# Altium PCB MainBoard.PcbDoc
Units mil, origin at the board's own origin, x right, y up, seen from the top; angles counter-clockwise.
Board outline 5000 x 4000 mil, 4 copper layers (Top Layer, Signal Layer 1, Signal Layer 2, Bottom Layer), stack 30.634 mil thick; 88 components, 118 nets, 480 pads, 59 vias.
Unrouted connection lines stored in the file: 60.
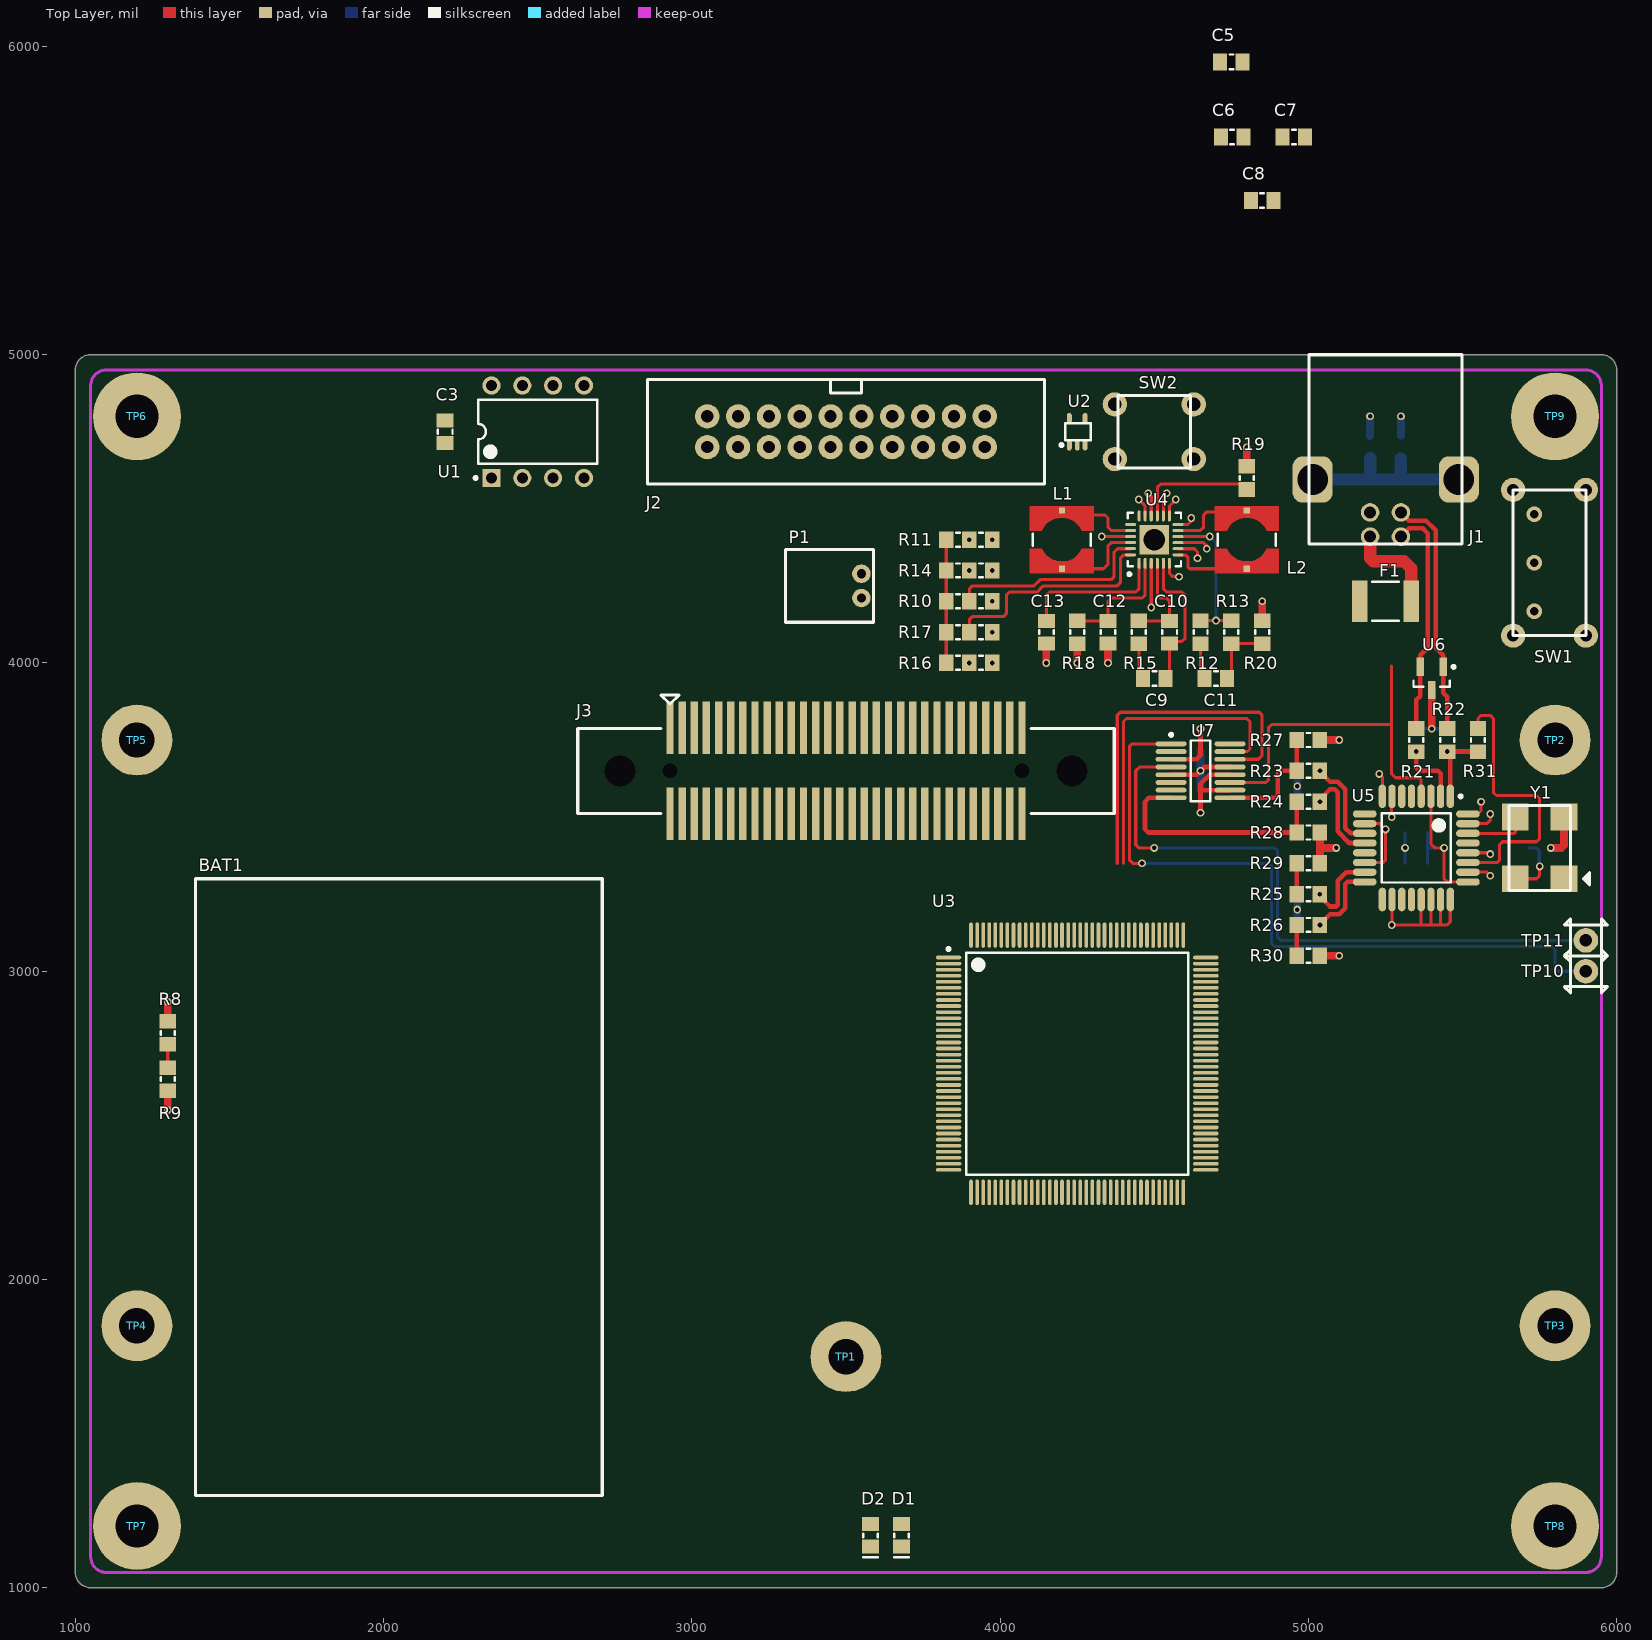
[diagram p0: Top Layer view]
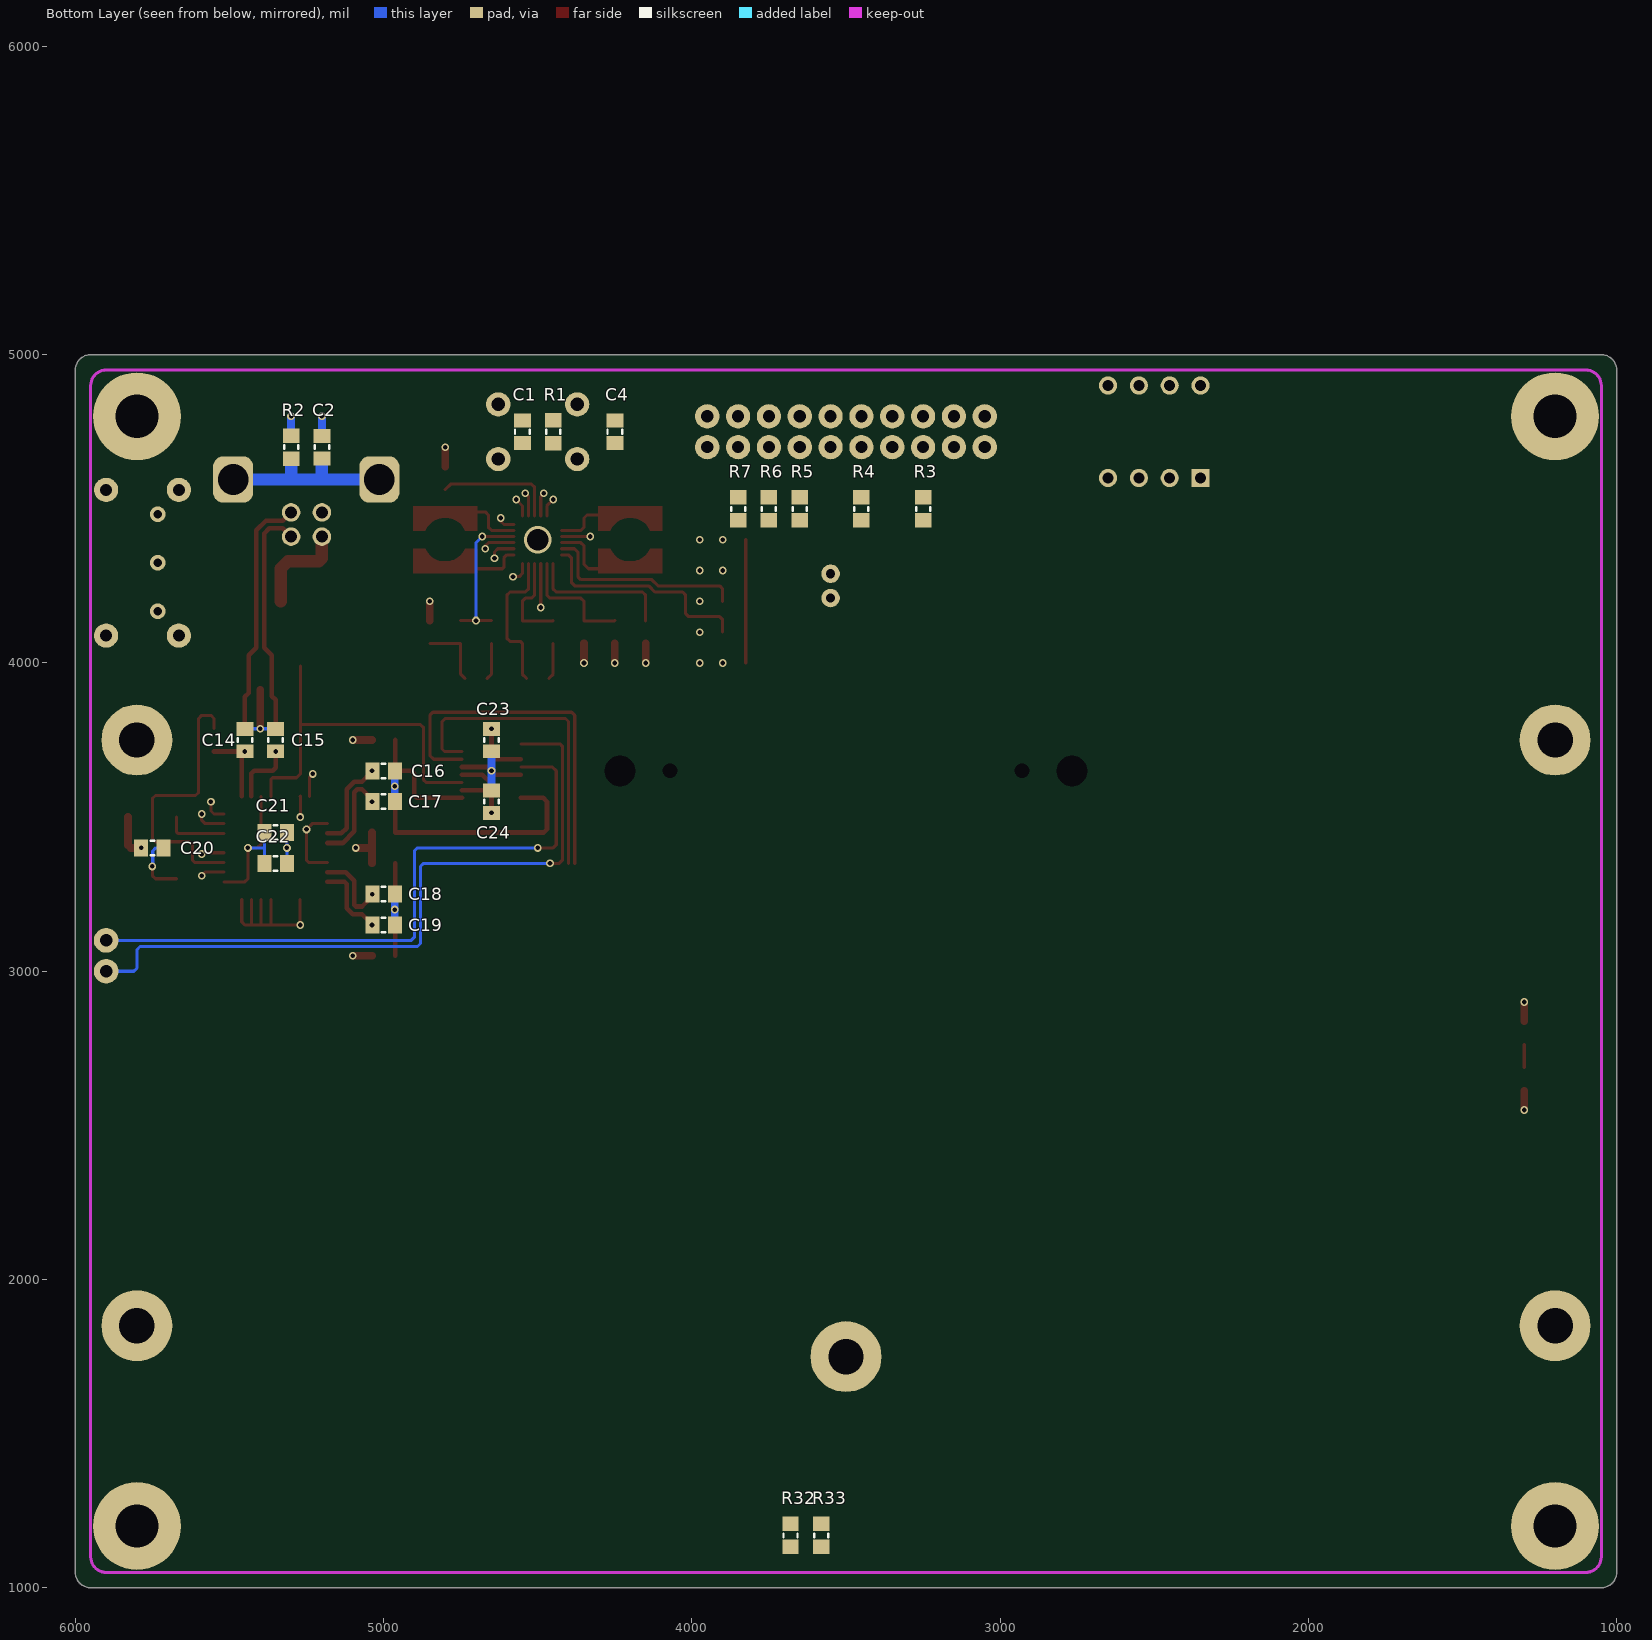
[diagram p1: Bottom Layer view, seen from below]
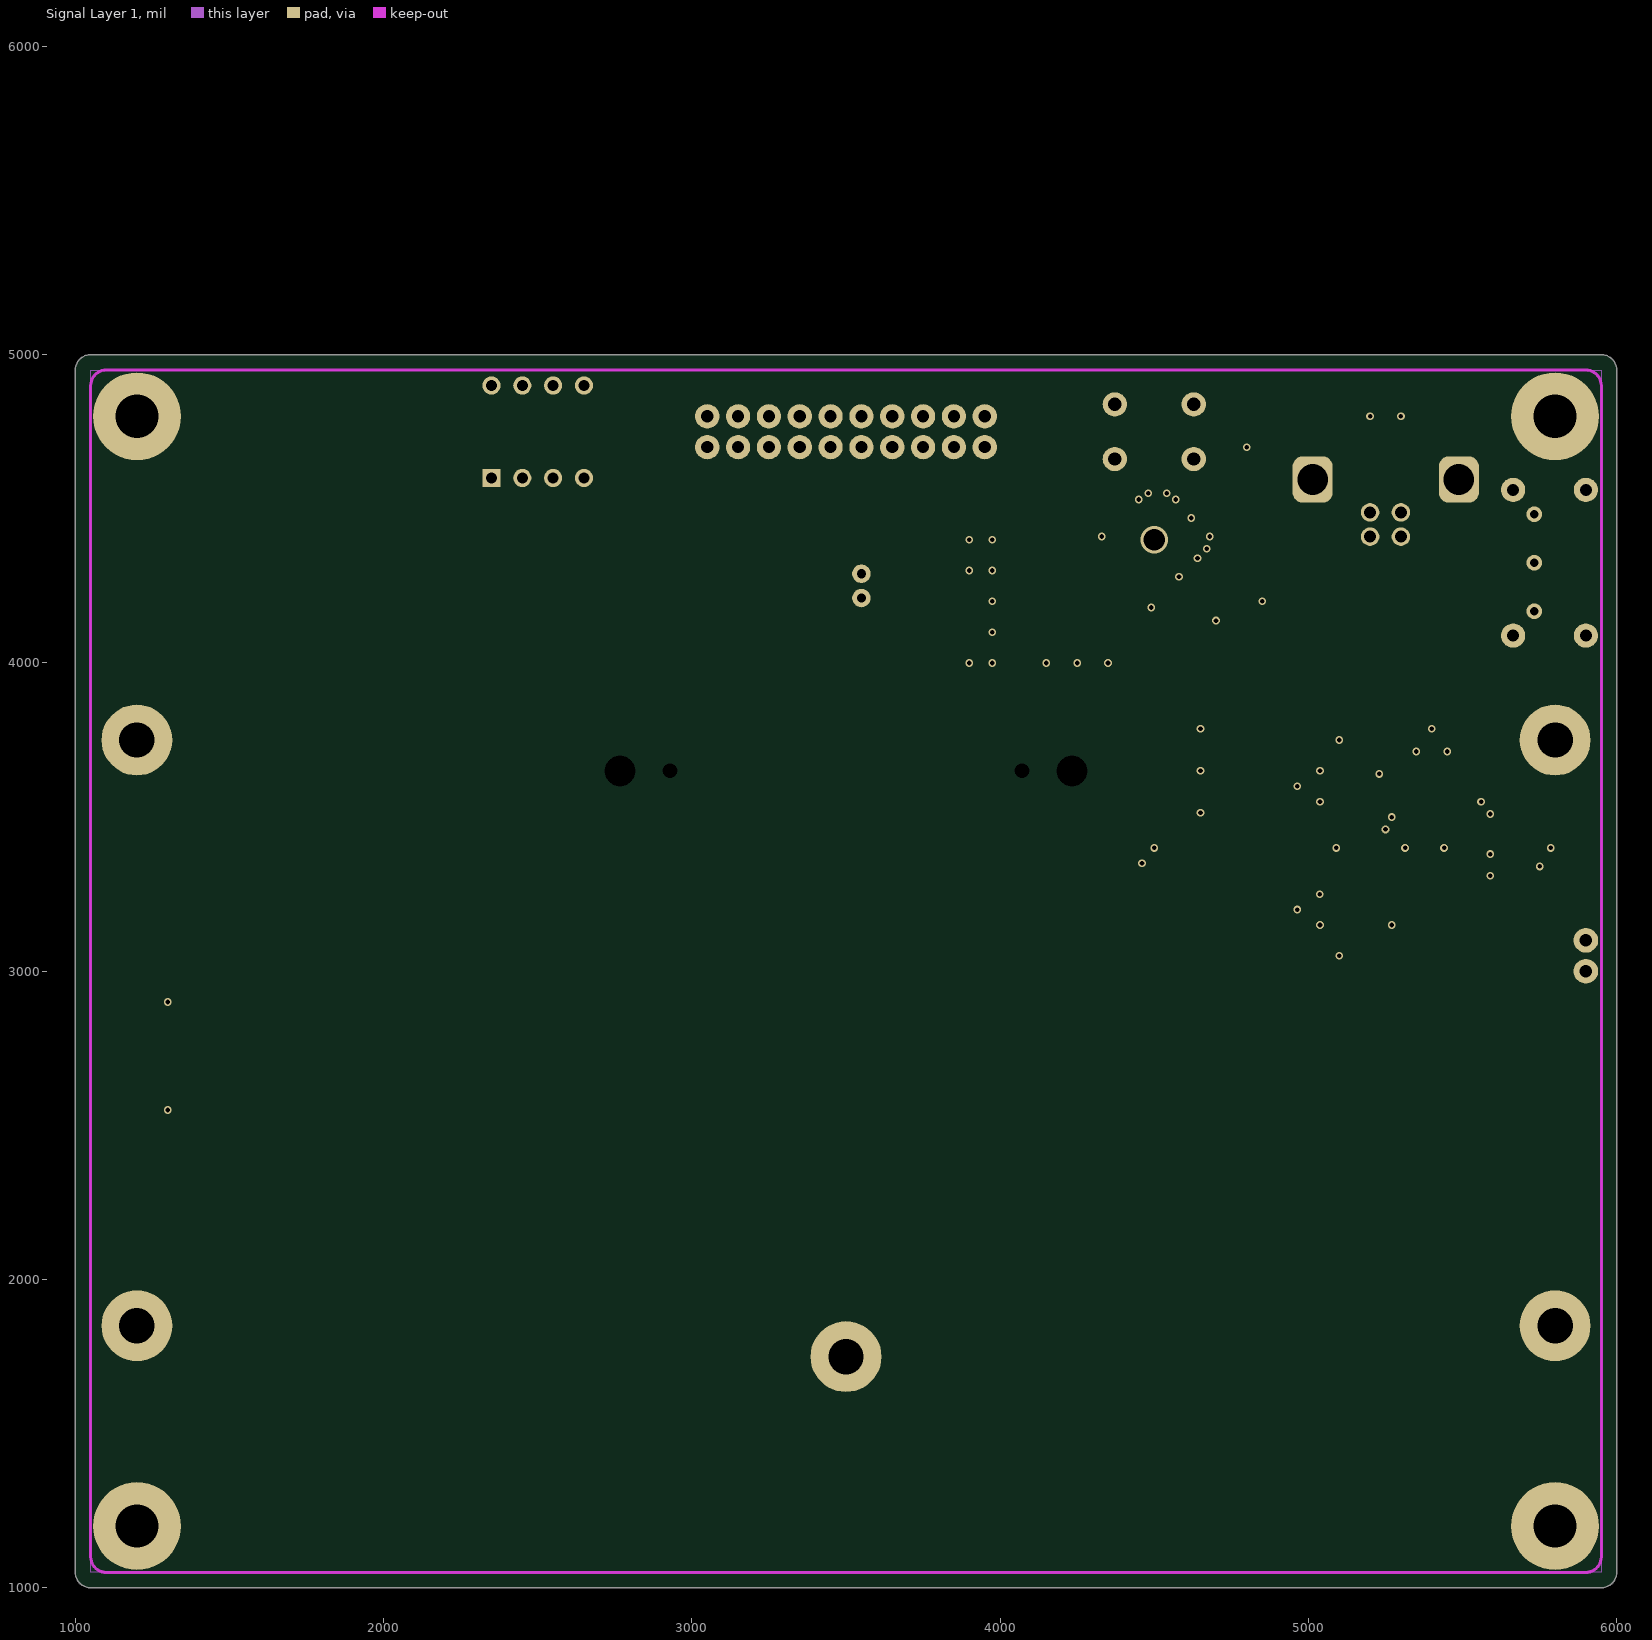
[diagram p2: Signal Layer 1]
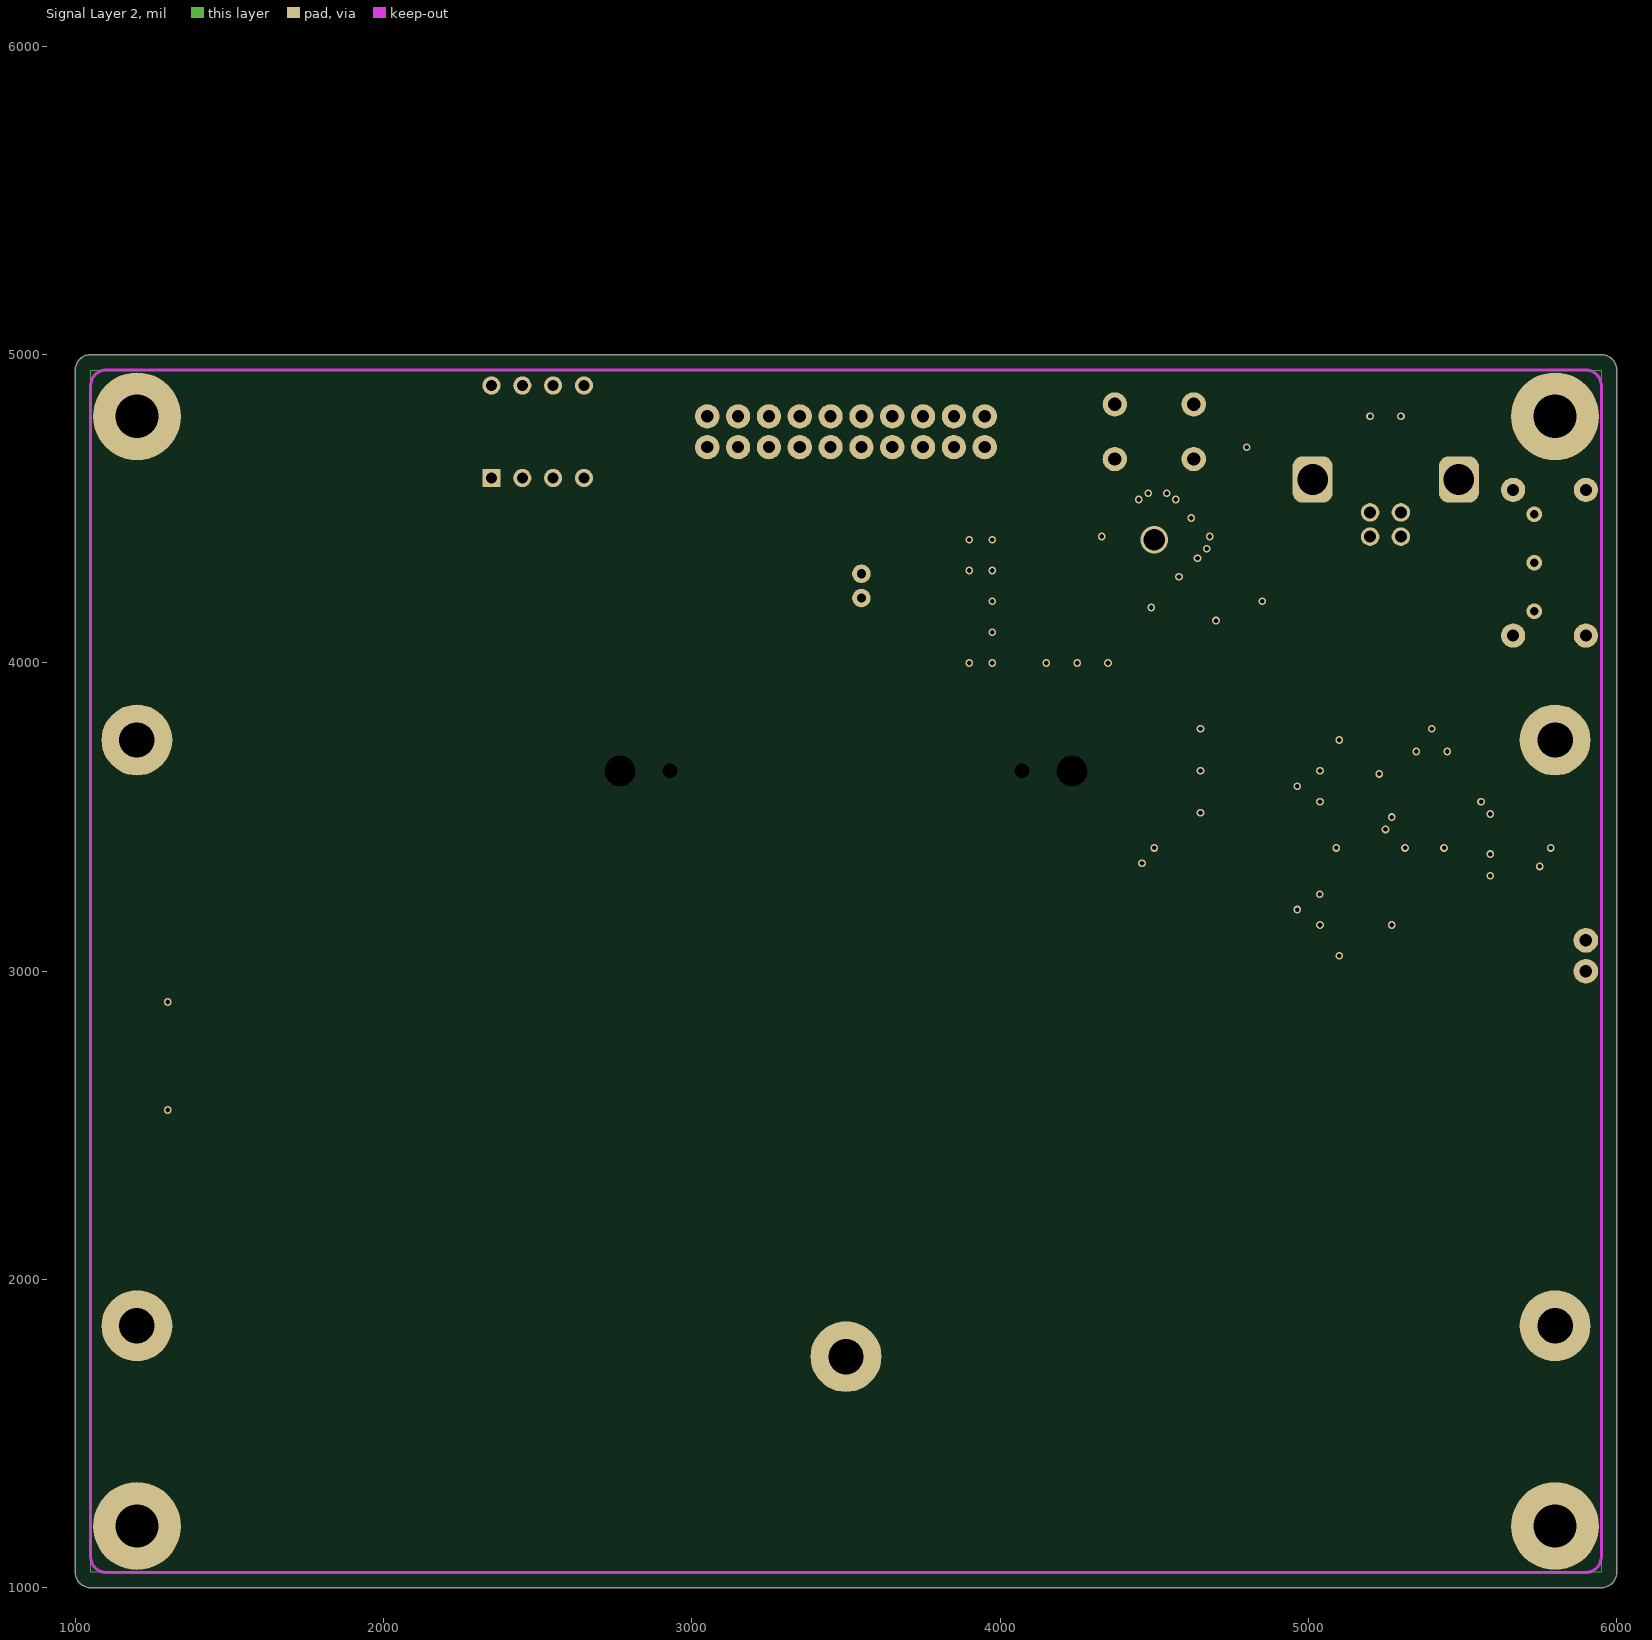
[diagram p3: Signal Layer 2]

## Layer stack, top to bottom
Top Solder: solder mask 0.4, Solder Resist, Dk 3.5
Top Layer: signal copper 1.4
Dielectric 1: core 10, FR-4, Dk 4.2
Signal Layer 1: signal copper 1.417
Dielectric 3: prepreg 5, Dk 4.2
Signal Layer 2: signal copper 1.417
Dielectric 2: core 10, Dk 4.2
Bottom Layer: signal copper 1.4
Bottom Solder: solder mask 0.4, Solder Resist, Dk 3.5

## Board outline
1050,1000 cw(c1050,1050) 1000,1050 1000,4950 cw(c1050,4950) 1050,5000 5950,5000 cw(c5950,4950) 6000,4950 6000,1050 cw(c5950,1050) 5950,1000

## Design rules (kind name [scope] priority, off if disabled: settings)
Clearance [All] p1: gap=10
DiffPairsRouting [All] p1: maxlimit=10 minlimit=10 mostfreqgap=10 toplayer_minwidth=15 toplayer_maxwidth=15 toplayer_prefwidth=15 midlayer1_minwidth=15 midlayer1_maxwidth=15 midlayer1_prefwidth=15 midlayer2_minwidth=15 midlayer2_maxwidth=15 midlayer2_prefwidth=15 bottomlayer_minwidth=15 bottomlayer_maxwidth=15 bottomlayer_prefwidth=15 maxuncoupledlength=500
PolygonConnect [All] p1: connectstyle=Relief reliefconductorwidth=10 reliefentries=4 polygonreliefangle="90 Angle" airgapwidth=10
RoutingVias [All] p1: holewidth=15 width=25 viastyle="Through Hole" minholewidth=15 minwidth=25 maxholewidth=28 maxwidth=50
SolderMaskExpansion [All] p1: expansion=4
Width [All] p1: maxlimit=100 minlimit=10 preferedwidth=10 minimp=50.000000 maximp=50.000000 favimp=50.000000
29 further rules are at their usual default settings.

## Classes and differential pairs
differential pair USB: +USB_P -USB_N
differential pair HUB: +HUB_P -HUB_N
differential pair HUB_FTDI: +HUB_FTDI_P -HUB_FTDI_N
differential pair HUB_ARM: +HUB_ARM_P -HUB_ARM_N
differential pair FTDI: +FTDI_P -FTDI_N
differential pair ARM: +ARM_P -ARM_N

## Components (designator, comment, footprint, x,y, rotation, side; value= is the part's Value field where it differs from the comment)
BAT1 "PRT-00339" "LiPo Battery - 1000mA" 2050,2300 r180 top (schematic designator BAT?)
C1 "1µF" C0805(2012)_NP_med 4550,4750 r90 bottom
C2 "4.7nF" C0805(2012)_NP_med 5200,4700 r90 bottom
C3 "0.1µF" C0805(2012)_NP_med 2200,4750 r270 top
C4 "0.1µF" C0805(2012)_NP_med 4250,4750 r270 bottom
C5 "10µF" C0805(2012)_NP_med 4750,5950 r0 top
C6 "22µF" C0805(2012)_NP_med 4752.76,5705.91 r0 top
C7 "2.2µF" C0805(2012)_NP_med 4952.76,5705.91 r0 top
C8 "22µF" C0805(2012)_NP_med 4850,5500 r0 top
C9 "330pF" C0805(2012)_NP_med 4500,3950 r180 top
C10 "10pF" C0805(2012)_NP_med 4550,4100 r90 top
C11 "33pF" C0805(2012)_NP_med 4700,3950 r180 top
C12 "0.1µF" C0805(2012)_NP_med 4350,4100 r270 top
C13 "0.1µF" C0805(2012)_NP_med 4150,4100 r270 top
C14 "47pF" C0805(2012)_NP_med 5450,3750 r90 bottom
C15 "47pF" C0805(2012)_NP_med 5350,3750 r90 bottom
C16 "47pF" C0805(2012)_NP_med 5000,3650 r180 bottom
C17 "47pF" C0805(2012)_NP_med 5000,3550 r180 bottom
C18 "47pF" C0805(2012)_NP_med 5000,3250 r180 bottom
C19 "47pF" C0805(2012)_NP_med 5000,3150 r180 bottom
C20 "0.1µF" C0805(2012)_NP_med 5750,3400 r0 bottom
C21 "0.1µF" C0805(2012)_NP_med 5350,3450 r180 bottom
C22 "0.1µF" C0805(2012)_NP_med 5350,3350 r180 bottom
C23 "4.7µF" C0805(2012)_NP_med 4650,3750 r270 bottom
C24 "0.1µF" C0805(2012)_NP_med 4650,3550 r90 bottom
D1 "LG R971-KN-1" C0805(2012)_P_med 3680,1170 r90 top
D2 "LG R971-KN-1" C0805(2012)_P_med 3580,1170 r90 top
F1 "Bel 0ZCG0200FF2C" C1812(4532)_NP_med 5250,4200 r180 top
J1 "KUSBXHT-BS1N-O-HRF" "Kycon KUSBXHT-BS1N-O-HRF" 5250,4595 r180 top locked
J2 "ARM JTAG" "3M 2520-6002UB" 3500,4750 r180 top
J3 "FSI-130-10-L-D-E-AD Mate" "FSI-130-10-L-D-E-AD - Mate" 3500,3650 r180 top locked
L1 "Wurth 744043003" "WURTH WE-TPC 4828" 4200,4400 r180 top
L2 "Wurth 7440430022" "WURTH WE-TPC 4828" 4800,4400 r0 top
P1 "PRT-09749" "SPARKFUN PRT-09749" 3550,4250 r270 top
R1 "10kΩ" R0805(2012)_med 4450,4750 r270 bottom
R2 "1MΩ" R0805(2012)_med 5300,4700 r90 bottom
R3 "10kΩ" R0805(2012)_med 3250,4500 r90 bottom
R4 "10kΩ" R0805(2012)_med 3450,4500 r90 bottom
R5 "10kΩ" R0805(2012)_med 3650,4500 r90 bottom
R6 "10kΩ" R0805(2012)_med 3750,4500 r90 bottom
R7 "10kΩ" R0805(2012)_med 3850,4500 r90 bottom
R8 "100kΩ" R0805(2012)_med 1300,2800 r90 top
R9 "Vishay NTCS0805E3104FXT" R0805(2012)_med 1300,2650 r90 top
R10 "0" R0805(2012)_med_double 3900,4200 r0 top
R11 "0" R0805(2012)_med_double 3900,4400 r0 top
R12 "121kΩ" R0805(2012)_med 4650,4100 r270 top
R13 "324kΩ" R0805(2012)_med 4750,4100 r270 top
R14 "0" R0805(2012)_med_double 3900,4300 r0 top
R15 "15kΩ" R0805(2012)_med 4450,4100 r90 top
R16 "0" R0805(2012)_med_double 3900,4000 r0 top
R17 "0" R0805(2012)_med_double 3900,4100 r0 top
R18 "3.01kΩ" R0805(2012)_med 4250,4100 r270 top
R19 "2kΩ" R0805(2012)_med 4800,4600 r90 top
R20 "105kΩ" R0805(2012)_med 4850,4100 r90 top
R21 "27Ω" R0805(2012)_med 5350,3750 r270 top
R22 "27Ω" R0805(2012)_med 5450,3750 r270 top
R23 "27Ω" R0805(2012)_med 5000,3650 r0 top
R24 "27Ω" R0805(2012)_med 5000,3550 r0 top
R25 "27Ω" R0805(2012)_med 5000,3250 r0 top
R26 "27Ω" R0805(2012)_med 5000,3150 r0 top
R27 "15kΩ" R0805(2012)_med 5000,3750 r180 top
R28 "15kΩ" R0805(2012)_med 5000,3450 r180 top
R29 "15kΩ" R0805(2012)_med 5000,3350 r180 top
R30 "15kΩ" R0805(2012)_med 5000,3050 r180 top
R31 "1.5kΩ" R0805(2012)_med 5550,3750 r270 top
R32 "220Ω" R0805(2012)_med 3680,1170 r90 bottom
R33 "220Ω" R0805(2012)_med 3580,1170 r90 bottom
SW1 "E-Switch EG1224" "E-Switch EG1224" 5782,4325 r90 top locked
SW2 "1825910-7" "TE 1825910-6" 4500,4750 r0 top locked
TP1 "Testpoint" "4-40 HOLE" 3500,1750 r0 top locked
TP2 "Testpoint" "4-40 HOLE" 5800,3750 r0 top locked
TP3 "Testpoint" "4-40 HOLE" 5800,1850 r0 top locked
TP4 "Testpoint" "4-40 HOLE" 1200,1850 r0 top locked
TP5 "Testpoint" "4-40 HOLE" 1200,3750 r0 top locked
TP6 "Testpoint" "6-32 Hole" 1200,4800 r0 top
TP7 "Testpoint" "6-32 Hole" 1200,1200 r0 top
TP8 "Testpoint" "6-32 Hole" 5800,1200 r0 top
TP9 "Testpoint" "6-32 Hole" 5800,4800 r0 top
TP10 "Testpoint" TESTPOINT 5900,3000 r180 top
TP11 "Testpoint" TESTPOINT 5900,3100 r180 top
U1 "25AA1024-I/P" PDIP300-P8 2500,4750 r90 top locked
U2 "TI SN74AUP1T08DCKR" "TI 5 Pin DCK (R-PDSO-G5)" 4250,4750 r90 top
U3 "ATSAME70Q21" "Atmel 144AA_M" 4250,2700 r0 top
U4 "LTC3566EUF#PBF" LT-UF-24_N 4500,4400 r90 top
U5 "TUSB2036VF" VF32_M 5350,3400 r270 top
U6 "TPD2E009DBZR" DBZ3_N 5400,3950 r270 top
U7 "FT230XS-R" SSOP-16_M 4650,3650 r0 top
Y1 "ASV-48.000MHZ-EJ-T" "Abracon ASV XO" 5750,3400 r90 top locked

## Footprints (in the part's own frame and the unit in brackets; to place one, negate y for a bottom-side part, rotate by r counter-clockwise, add the part's x,y. Pads: shape width x height; smd on the part's side, far side on the other; paste and mask are expansions set on the pad)
"3M 2520-6002UB" [mm] "SHROUDED HEADER 20 POS STRAIGHT"
  round 2 hole 1: 1(-11.43,-1.27) 2(-11.43,1.27) 3(-8.89,-1.27) 4(-8.89,1.27) 5(-6.35,-1.27) 6(-6.35,1.27) 7(-3.81,-1.27) 8(-3.81,1.27) 9(-1.27,-1.27) 10(-1.27,1.27) 11(1.27,-1.27) 12(1.27,1.27) 13(3.81,-1.27) 14(3.81,1.27) 15(6.35,-1.27) 16(6.35,1.27) 17(8.89,-1.27) 18(8.89,1.27) 19(11.43,-1.27) 20(11.43,1.27)
  silkscreen extent -16.36,-4.3 16.36,4.3, body extent -16.36,-4.3 16.36,4.29, height 9.91
"4-40 HOLE" [mil] "A hole"
  round 230 hole 115: 1(0,0)
"6-32 Hole" [mil] "A hole"
  round 285 hole 140: 1(0,0)
"Abracon ASV XO" [mm] "OSCILLATOR 16.000MHZ 3.3V SMD"
  rect 2.2x2.2 smd: 1(-2.54,-2) 2(2.54,-2) 3(2.54,2) 4(-2.54,2)
  silkscreen extent -3.5,-4.11 3.5,2.54, body extent -3.5,-2.54 3.5,2.54, height 1.8
"Atmel 144AA_M" [mm] "Thin QFP, 144-Leads, Body 20x20mm, Pitch 0.5mm, IPC Low Density"
  oval 2.1x0.3 smd: 1(-10.6,8.75) 2(-10.6,8.25) 3(-10.6,7.75) 4(-10.6,7.25) 5(-10.6,6.75) 6(-10.6,6.25) 7(-10.6,5.75) 8(-10.6,5.25) 9(-10.6,4.75) 10(-10.6,4.25) 11(-10.6,3.75) 12(-10.6,3.25) 13(-10.6,2.75) 14(-10.6,2.25) 15(-10.6,1.75) 16(-10.6,1.25) 17(-10.6,0.75) 18(-10.6,0.25) 19(-10.6,-0.25) 20(-10.6,-0.75) 21(-10.6,-1.25) 22(-10.6,-1.75) 23(-10.6,-2.25) 24(-10.6,-2.75) 25(-10.6,-3.25) 26(-10.6,-3.75) 27(-10.6,-4.25) 28(-10.6,-4.75) 29(-10.6,-5.25) 30(-10.6,-5.75) 31(-10.6,-6.25) 32(-10.6,-6.75) 33(-10.6,-7.25) 34(-10.6,-7.75) 35(-10.6,-8.25) 36(-10.6,-8.75) 73(10.6,-8.75) 74(10.6,-8.25) 75(10.6,-7.75) 76(10.6,-7.25) 77(10.6,-6.75) 78(10.6,-6.25) 79(10.6,-5.75) 80(10.6,-5.25) 81(10.6,-4.75) 82(10.6,-4.25) 83(10.6,-3.75) 84(10.6,-3.25) 85(10.6,-2.75) 86(10.6,-2.25) 87(10.6,-1.75) 88(10.6,-1.25) 89(10.6,-0.75) 90(10.6,-0.25) 91(10.6,0.25) 92(10.6,0.75) 93(10.6,1.25) 94(10.6,1.75) 95(10.6,2.25) 96(10.6,2.75) 97(10.6,3.25) 98(10.6,3.75) 99(10.6,4.25) 100(10.6,4.75) 101(10.6,5.25) 102(10.6,5.75) 103(10.6,6.25) 104(10.6,6.75) 105(10.6,7.25) 106(10.6,7.75) 107(10.6,8.25) 108(10.6,8.75)
  oval 0.3x2.1 smd: 37(-8.75,-10.6) 38(-8.25,-10.6) 39(-7.75,-10.6) 40(-7.25,-10.6) 41(-6.75,-10.6) 42(-6.25,-10.6) 43(-5.75,-10.6) 44(-5.25,-10.6) 45(-4.75,-10.6) 46(-4.25,-10.6) 47(-3.75,-10.6) 48(-3.25,-10.6) 49(-2.75,-10.6) 50(-2.25,-10.6) 51(-1.75,-10.6) 52(-1.25,-10.6) 53(-0.75,-10.6) 54(-0.25,-10.6) 55(0.25,-10.6) 56(0.75,-10.6) 57(1.25,-10.6) 58(1.75,-10.6) 59(2.25,-10.6) 60(2.75,-10.6) 61(3.25,-10.6) 62(3.75,-10.6) 63(4.25,-10.6) 64(4.75,-10.6) 65(5.25,-10.6) 66(5.75,-10.6) 67(6.25,-10.6) 68(6.75,-10.6) 69(7.25,-10.6) 70(7.75,-10.6) 71(8.25,-10.6) 72(8.75,-10.6) 109(8.75,10.6) 110(8.25,10.6) 111(7.75,10.6) 112(7.25,10.6) 113(6.75,10.6) 114(6.25,10.6) 115(5.75,10.6) 116(5.25,10.6) 117(4.75,10.6) 118(4.25,10.6) 119(3.75,10.6) 120(3.25,10.6) 121(2.75,10.6) 122(2.25,10.6) 123(1.75,10.6) 124(1.25,10.6) 125(0.75,10.6) 126(0.25,10.6) 127(-0.25,10.6) 128(-0.75,10.6) 129(-1.25,10.6) 130(-1.75,10.6) 131(-2.25,10.6) 132(-2.75,10.6) 133(-3.25,10.6) 134(-3.75,10.6) 135(-4.25,10.6) 136(-4.75,10.6) 137(-5.25,10.6) 138(-5.75,10.6) 139(-6.25,10.6) 140(-6.75,10.6) 141(-7.25,10.6) 142(-7.75,10.6) 143(-8.25,10.6) 144(-8.75,10.6)
  silkscreen extent -10.72,-9.15 9.15,9.57, body extent -10,-10 10,10, height 1.6
C0805(2012)_NP_med [mm] "Chip Capacitor, 2-Leads, Body 2.0x1.3mm, IPC Medium Density"
  rect 1.15x1.4 smd: 1(-0.925,0) 2(0.925,0)
  silkscreen extent -0.15,-0.6 0.15,0.6, body extent -1.1,-0.67 1.1,0.67, height 0.7
C0805(2012)_P_med [mm] "Chip Capacitor, 2-Leads, Body 2.0x1.3mm, IPC Medium Density"
  rect 1.15x1.4 smd: 1(-0.925,0) 2(0.925,0)
  silkscreen extent -1.8,-0.6 0.15,0.6, body extent -1.1,-0.67 1.1,0.67, height 0.7
C1812(4532)_NP_med [mm] "Chip Capacitor, 2-Leads, Body 4.5x3.2mm, IPC Medium Density"
  rect 1.25x3.4 smd: 1(-2.125,0) 2(2.125,0)
  silkscreen extent -1.1,-1.6 1.1,1.6, body extent -2.35,-1.7 2.35,1.7, height 0.7
DBZ3_N [mm] "SOT23, 3-Leads, Body 2.9x1.3mm, Pitch 0.95mm, Lead Span 2.4mm, IPC Medium Density"
  rect 1.5x0.6 smd: 1(-0.95,0.95) 2(-0.95,-0.95) 3(0.95,0)
  silkscreen extent -1.07,-1.5 0.7,1.93, body extent -0.7,-1.52 0.7,1.52, height 1.12
"E-Switch EG1224" [mm] "SWITCH SLIDE SPDT 500MA 15V"
  round 1.3 hole 0.7: 1(-4,1.25) 2(0,1.25) 3(4,1.25)
  round 2 hole 1: 4(-6,-3) 4(-6,3) 4(6,-3) 4(6,3)
  silkscreen extent -6,-3 6,3, body extent -6.9,-12.25 6.9,3.25, height 8.5
"FSI-130-10-L-D-E-AD - Mate" [mm] "CONN INTERFACE ONE PC 1MM 60POS"
  rect 0.61x4.318 smd: 1(14.5,-3.55) 2(14.5,3.55) 3(13.5,-3.55) 4(13.5,3.55) 5(12.5,-3.55) 6(12.5,3.55) 7(11.5,-3.55) 8(11.5,3.55) 9(10.5,-3.55) 10(10.5,3.55) 11(9.5,-3.55) 12(9.5,3.55) 13(8.5,-3.55) 14(8.5,3.55) 15(7.5,-3.55) 16(7.5,3.55) 17(6.5,-3.55) 18(6.5,3.55) 19(5.5,-3.55) 20(5.5,3.55) 21(4.5,-3.55) 22(4.5,3.55) 23(3.5,-3.55) 24(3.5,3.55) 25(2.5,-3.55) 26(2.5,3.55) 27(1.5,-3.55) 28(1.5,3.55) 29(0.5,-3.55) 30(0.5,3.55) 31(-0.5,-3.55) 32(-0.5,3.55) 33(-1.5,-3.55) 34(-1.5,3.55) 35(-2.5,-3.55) 36(-2.5,3.55) 37(-3.5,-3.55) 38(-3.5,3.55) 39(-4.5,-3.55) 40(-4.5,3.55) 41(-5.5,-3.55) 42(-5.5,3.55) 43(-6.5,-3.55) 44(-6.5,3.55) 45(-7.5,-3.55) 46(-7.5,3.55) 47(-8.5,-3.55) 48(-8.5,3.55) 49(-9.5,-3.55) 50(-9.5,3.55) 51(-10.5,-3.55) 52(-10.5,3.55) 53(-11.5,-3.55) 54(-11.5,3.55) 55(-12.5,-3.55) 56(-12.5,3.55) 57(-13.5,-3.55) 58(-13.5,3.55) 59(-14.5,-3.55) 60(-14.5,3.55)
  rect 0x0 hole 1.2 unplated: A1(14.5,0) A2(-14.5,0)
  rect 0x0 hole 2.54 unplated: M1(18.62,0) M2(-18.62,0)
  silkscreen extent -22.1,-6.25 22.1,3.5
"Kycon KUSBXHT-BS1N-O-HRF" [mil] "CONN USB RECEPT R/A TYPE B 4POS"
  round 60 hole 39.37: 1(50,185.43) 2(-50,185.43) 3(-50,106.69) 4(50,106.69)
  rrect50% 130x150 hole 100: MH1(-237.8,0) MH2(236.22,0)
  silkscreen extent -248,-405 248,209, body extent -248,-405 248,209, height 448
"LiPo Battery - 1000mA" [mil] "Polymer Lithium Ion Battery - 1000mAh"
  silkscreen extent -659,-1000 659,1000, body extent -659,-1000 659,1000, height 228
LT-UF-24_N [mm] "QFN, 24-Leads, Body 4.1x4.1mm, Pitch 0.5mm, Thermal Pad 2.45x2.45mm, IPC Medium Density"
  oval 0.9x0.25 smd: 1(-1.95,1.25) 2(-1.95,0.75) 3(-1.95,0.25) 4(-1.95,-0.25) 5(-1.95,-0.75) 6(-1.95,-1.25) 13(1.95,-1.25) 14(1.95,-0.75) 15(1.95,-0.25) 16(1.95,0.25) 17(1.95,0.75) 18(1.95,1.25)
  oval 0.25x0.9 smd: 7(-1.25,-1.95) 8(-0.75,-1.95) 9(-0.25,-1.95) 10(0.25,-1.95) 11(0.75,-1.95) 12(1.25,-1.95) 19(1.25,1.95) 20(0.75,1.95) 21(0.25,1.95) 22(-0.25,1.95) 23(-0.75,1.95) 24(-1.25,1.95)
  rect 2.45x2.45 smd: 25(0,0)
  silkscreen extent -2.97,-2.2 2.2,2.2, body extent -2.05,-2.05 2.05,2.05, height 0.8
PDIP300-P8 [mm] "DIP, 8-Leads, Row Spacing 7.62mm, Pitch 2.54mm, Body 9.5x6.6mm"
  rect 1.5x1.5 hole 0.9: 1(-3.81,3.81)
  round 1.5 hole 0.9: 2(-3.81,1.27) 3(-3.81,-1.27) 4(-3.81,-3.81) 5(3.81,-3.81) 6(3.81,-1.27) 7(3.81,1.27) 8(3.81,3.81)
  silkscreen extent -3.93,-4.9 2.65,5.23, body extent -3.55,-4.9 3.55,4.9, height 4.32
R0805(2012)_med [mm] "Chip Resistor, 2-Leads, Body 2.0x1.3mm, IPC Medium Density"
  rect 1.2x1.35 smd: 1(-0.95,0) 2(0.95,0)
  silkscreen extent -0.15,-0.58 0.15,0.58, body extent -1.1,-0.67 1.1,0.67, height 0.7
R0805(2012)_med_double [mm] "Chip Resistor, 2-Leads, Body 2.0x1.3mm, IPC Medium Density"
  rect 1.2x1.35 smd: 1(-1.9,0) 2(0,0) 3(1.9,0)
  silkscreen extent -1.1,-0.58 1.1,0.58, body extent -0.15,-0.67 2.05,0.67, height 0.7
"SPARKFUN PRT-09749" [mil] "JST Right-Angle Connector - Through-Hole 2-Pin"
  round 60 hole 30: 1(-39.37,0) 2(39.37,0)
  silkscreen extent -118,-246 118,39, body extent -118,-246 118,39, height 197
SSOP-16_M [mm] "SOP, 16-Leads, Body 4.9x3.9mm, Pitch 0.635mm, IPC Low Density"
  oval 2.55x0.4 smd: 1(-2.425,2.222) 2(-2.425,1.587) 3(-2.425,0.953) 4(-2.425,0.318) 5(-2.425,-0.318) 6(-2.425,-0.953) 7(-2.425,-1.587) 8(-2.425,-2.222) 9(2.425,-2.222) 10(2.425,-1.587) 11(2.425,-0.953) 12(2.425,-0.318) 13(2.425,0.318) 14(2.425,0.953) 15(2.425,1.587) 16(2.425,2.222)
  silkscreen extent -2.55,-2.5 0.8,3.1, body extent -1.99,-2.5 1.99,2.5, height 1.76
"TE 1825910-6" [mm] "SWITCH TACTILE SPST-NO 0.05A 24V"
  round 2 hole 1.1: 1(-3.25,2.25) 2(3.25,2.25) 3(-3.25,-2.25) 4(3.25,-2.25)
  silkscreen extent -3,-3 3,3, body extent -3.05,-3.05 3.05,3, height 4.98
TESTPOINT [mil] "Testpoint, Keystone, Multipurpose .063"
  round 80 hole 40: 1(0,0)
  silkscreen extent -70,-70 70,70
"TI 5 Pin DCK (R-PDSO-G5)" [mm] "Texas Instruments 20 Pin PW Package (0.65mm pitch, 4.4mm width,"
  oval 0.9x0.4 smd: 1(-1.1,0.65) 2(-1.1,0) 3(-1.1,-0.65) 4(1.1,0.65) 5(1.1,-0.65)
  silkscreen extent -1.22,-1.1 0.7,1.42, body extent -0.7,-1.1 0.7,1, height 1.2
VF32_M [mm] "Thin QFP, 32-Leads, Body 7x7mm, Pitch 0.8mm, IPC Low Density"
  oval 1.95x0.6 smd: 1(-4.25,2.8) 2(-4.25,2) 3(-4.25,1.2) 4(-4.25,0.4) 5(-4.25,-0.4) 6(-4.25,-1.2) 7(-4.25,-2) 8(-4.25,-2.8) 17(4.25,-2.8) 18(4.25,-2) 19(4.25,-1.2) 20(4.25,-0.4) 21(4.25,0.4) 22(4.25,1.2) 23(4.25,2) 24(4.25,2.8)
  oval 0.6x1.95 smd: 9(-2.8,-4.25) 10(-2,-4.25) 11(-1.2,-4.25) 12(-0.4,-4.25) 13(0.4,-4.25) 14(1.2,-4.25) 15(2,-4.25) 16(2.8,-4.25) 25(2.8,4.25) 26(2,4.25) 27(1.2,4.25) 28(0.4,4.25) 29(-0.4,4.25) 30(-1.2,4.25) 31(-2,4.25) 32(-2.8,4.25)
  silkscreen extent -4.37,-2.85 2.85,3.78, body extent -3.5,-3.5 3.5,3.5, height 1.6
"WURTH WE-TPC 4828" [mm] "Standard-ish 1919 SMT Package"
  rect 0.5x0.5 smd paste+0 mask+0: 1(0,2.4) 2(0,-2.4)
  Top Layer region: 2.65,-0.75 2.65,-2.75 -2.65,-2.75 -2.65,-0.75 -1.649,-0.75 -1.225,-1.327 -0.612,-1.695 0.096,-1.799 0.096,-1.799 0.73,-1.656 1.267,-1.289 1.631,-0.75 1.631,-0.75
  Top Layer region: -2.65,0.75 -2.65,2.75 2.65,2.75 2.65,0.75 1.649,0.75 1.225,1.327 0.612,1.695 -0.096,1.799 -0.096,1.799 -0.73,1.656 -1.267,1.289 -1.631,0.75 -1.631,0.75
  silkscreen extent -2.4,-0.5 2.4,0.5, body extent -2.4,-2.4 2.4,2.4, height 2.8

## Part data
BAT1: "Polymer Lithium Ion Battery - 1000mAh"
C1 C2 C3 C4 C5 C6 C7 C8 C9 C10 C11 C12 C13 C14 C15 C16 C17 C18 C19 C20 C21 C22 C23 C24: library part CPN_SMT, "SMT Capacitor"
D1 D2: library part DIODE_sMT, "SMT LED"
F1: "PTC RESTTBLE 2.0A 8V CHIP 1812"
J1: library part "Kycon KUSBXHT-BS1N-O-HRF", "TYPE B ORANGE HIGH TEMP/RETENTION"
J2: library part "20-Pin ARM JTAG Programming Header", "Standard 20-Pin Pinout"
J3: library part "Samtec FSI-130-10-L-D-E-AD Mate", "CONN INTERFACE ONE PC 1MM 60POS"
L1: "FIXED IND 3.3UH 2.15A 35 MOHM"
L2: "FIXED IND 2.2UH 2.5A 28 MOHM SMD"
P1: library part "Header 2", "Header, 2-Pin"
R1 R2 R3 R4 R5 R6 R7 R8 R12 R13 R15 R18 R19 R20 R21 R22 R23 R24 R25 R26 R27 R28 R29 R30 R31 R32 R33: library part RES_SMT, "SMT resistor"
R9: "THERMISTOR NTC 100K OHM 1% 0805"
R10 R11 R14 R16 R17: library part RES_SMT_NONPOP, "SMT resistor"
SW1: "SWITCH SLIDE SPDT 500MA 15V"
SW2: library part "TE 1825910-6", "SWITCH TACTILE SPST-NO 0.05A 24V"
TP10 TP11: "A single hole in the board"
U1: "1 Mbit SPI Bus Serial EEPROM, 8-Pin PDIP, Industrial Temperature"
U2: "IC GATE AND 1CH 2-INP SC-70-5"
U3: library part "Atmel SAME70Q21", "IC MCU 32BIT 2048KB FLASH"
U4: "High Efficiency USB Power Manager Plus 1 A Buck-Boost Converter, 4.35 to 5.5 V Vin, 24-pin QFN (UF-24), -40 to 85 degC, Pb-Free"
U5: "2 / 3-Port Hub for USB with Optional Serial EEPROM Interface, 3.3V, 0 to 70 degC, 32-Pin LQFP (VF), Green (RoHS & no Sb/Br)"
U6: "ESD Protection Array for High-Speed Data Interfaces, 2 Channels, -40 to +85 degC, 3-pin SOT-23 (DBZ), Green (RoHS & no Sb/Br)"
U7: "USB to Basic UART Interface Chip, UHCI/OHCI/EHCI Compatible, USB 2.0 Compatible, -40 to +85 degC, 16-Pin SSOP, Pb-Free, Tape and Reel"
Y1: library part "Abacrom ASV Series", "OSC XO X.000MHZ HCMOS SMD"

## Via types
v1: diameter 25, hole 15, Top Layer to Bottom Layer, tented both sides, 47 vias
v2: diameter 25, hole 15, Top Layer to Bottom Layer, 11 vias
v3: diameter 90, hole 70, Top Layer to Bottom Layer, tented both sides, 1 vias

## Nets (pads, with @x,y where several pads share a name; then routed paths per layer and width w, separated by ;. In a path a pad name is that pad's centre, name@x,y a point inside that pad or via, vN(x,y) a via of type N, cw(c..) or ccw(c..) an arc to the next point about the centre after c; other vN are vias at no path point)
+3V3: C3.1 C4.1 J2.1 J2.2 J3.53 R1.1 R3.1 R4.1 R5.1 R6.1 R7.1 SW1.1 U1.8 U2.5
+3V3_GATED: C20.1 C21.1 C22.1 C23.1 C24.1 D1.2 D2.2 U5.3 U5.8 U5.10 U5.14 U5.18 U5.21 U5.22 U5.23 U5.24 U5.25 U5.26 U5.31 U7.3 U7.10 U7.12 Y1.4 | length 2313
  Top Layer w10: U5.14 5242.76,3352.76 5250,3360 v1(5250,3460) 5231.26,3478.74 U5.10 ; v1(5230,3640) 5239.76,3630.24 U5.8 ; U5.18 5271.26,3151.26 v1(5270,3150) 5430,3150 ; 5365.75,3155.75 U5.21 ; 5397.24,3152.76 U5.22 ; U5.3 5397.24,3412.76 5410,3400 v1(5440,3400) 5440,3299.76 5450,3289.76 U5.25 ; U5.23 5428.74,3151.26 5430,3150 ; U5.24 5460,3232.44 5460,3160 5450,3150 5430,3150 ; U5.26 5578.74,3321.26 v1(5590,3310) ; U5.31 5578.74,3478.74 5590,3490 v1(5590,3510) ; Y1.4 5740,3300 5750,3310 v1(5750,3340)
  Top Layer w15: U7.3 4637.5,3687.5 4650,3700 v1(4650,3786.42) ; v1(4650,3513.58) 4650,3590 ; U7.10 4652.5,3587.5 4650,3590 ; U7.12 4680,3637.5 4650,3607.5 4650,3590
  Bottom Layer w10: C22.1 5386.42,3400 ; C21.1 5386.42,3400 ; v1(5440,3400) 5386.42,3400 ; C20.1 5738.78,3400 5748.78,3390 5748.78,3341.22 v1(5750,3340)
+3V3_UNSWITCHED: C8.2 R12.1 R13.1 SW1.2 U4.10 | length 484.2
  Top Layer w10: U4.10 4679.84,4409.84 v1(4680,4410) ; R12.1 v1(4700,4137.4) R13.1
  Bottom Layer w10: v1(4680,4410) 4700,4390 v1(4700,4137.4)
+VOUT: C6.2 C7.2 L1.2 U4.9 U4.20 | length 375.1
  Top Layer w10: L1.2 4214.49,4480 4340,4480 4350,4470 4350,4440 4360.47,4429.53 U4.20 ; U4.9 4659.84,4390.16 4670,4380 v1(4670,4370)
+VUSB: C5.2 F1.2 R8.2 R10.1 R11.1 R14.1 R16.1 R17.1 U4.21 | length 555.9
  Top Layer w10: R16.1 R17.1 R10.1 R14.1 R11.1 ; v1(4330,4410) 4330.16,4409.84 U4.21
  Top Layer w25: R8.2 v1(1300,2900)
ARM_N: R25.1 R29.2 | length 100
  Top Layer w15: R25.1 R29.2
ARM_P: R26.1 R30.2 | length 100
  Top Layer w15: R30.2 R26.1
ARM_R\E\S\E\T\: U2.4
FTDI_N: R23.1 R27.2 U7.9 | length 394.4
  Top Layer w15: U7.9 4892.5,3562.5 4900,3570 4900,3640 4910,3650 R23.1 R27.2
FTDI_P: R24.1 R28.2 U7.8 | length 776.3
  Top Layer w15: U7.8@4554.53,3562.13 4482.13,3562.13 4470,3550 4470,3460 4480,3450 R28.2 R24.1
FTDI_RX: TP11.1 U7.4 | length 2112.1
  Top Layer w10: v1(4500,3400) 4450,3400 4440,3410 4440,3650 4452.5,3662.5 U7.4
  Bottom Layer w10: v1(4500,3400) 4890,3400 4900,3390 4900,3110 4910,3100 TP11.1
FTDI_RX_LED: R32.2 U7.15 | length 1036.5
  Top Layer w10: 4400,3350 4400,3810 4410,3820 4800,3820 4810.67,3809.33 4810.67,3720.67 4802.5,3712.5 U7.15
FTDI_TX: TP10.1 U7.1 | length 2318.3
  Top Layer w10: v1(4460,3350) 4430,3350 4420,3360 4420,3730 4427.5,3737.5 U7.1
  Bottom Layer w10: v1(4460,3350) 4870,3350 4880,3340 4880,3090 4890,3080 5790,3080 5800,3070 5800,3010 5810,3000 TP10.1
FTDI_TX_LED: R33.2 U7.14 | length 1198
  Top Layer w10: 4380,3350 4380,3830 4390,3840 4840,3840 4850,3830 4850,3700 4837.5,3687.5 U7.14
GND: C1.2 C2.2 C3.2 C4.2 C5.1 C6.1 C7.1 C8.1 C12.2 C13.2 C14.2 C15.2 C16.2 C17.2 C18.2 C19.2 C20.2 C21.2 C22.2 C23.2 C24.2 J1.4 J2.4 J2.6 J2.8 J2.10 J2.12 J2.14 J2.16 J2.18 J2.20 J3.55 P1.2 R2.2 R9.1 R10.3 R11.3 R14.3 R16.3 R17.3 R18.2 R19.2 R20.2 R27.1 R28.1 R29.1 R30.1 SW1.4 SW2.1 SW2.2 TP1.1 TP2.1 TP3.1 TP4.1 TP5.1 TP6.1 TP7.1 TP8.1 TP9.1 U1.4 U2.3 U4.6 U4.12 U4.17 U4.25 U5.7 U5.28 U5.32 U6.3 U7.5 U7.13 Y1.2 | length 2183
  Top Layer w10: v1(4450,4530) 4470.47,4509.53 U4.17 ; U4.6 4549.21,4290.79 4560,4280 v1(4580,4280) ; U4.12 4609.21,4449.21 4620,4460 v1(4620,4470) ; v1(5270,3500) 5270,3568.58 U5.7 ; U5.28 5585.75,3384.25 v1(5590,3380) ; U5.32 5550.24,3510.24 5560,3520 v1(5560,3550)
  Top Layer w15: U7.5 4637.5,3637.5 v1(4650,3650) 4662.5,3662.5 U7.13
  Top Layer w25: v1(1300,2550) R9.1 ; v2(4150,4000) C13.2 ; v2(4250,4000) R18.2@4250,4063.58 ; v2(4350,4000) C12.2 ; R19.2 v1(4800,4700) ; R20.2 v1(4850,4200) ; R30.1 v1(5100,3050) ; R29.1 5037.4,3400 ; R28.1 5037.4,3400 ; R27.1 v1(5100,3750) ; v1(5090,3400) 5037.4,3400 ; v1(5400,3786.42) U6.3 ; v1(5786.42,3400) 5820,3400 5828.74,3408.74 Y1.2
  Bottom Layer w10: C22.2 v1(5313.58,3400) C21.2 ; C15.2 v1(5400,3786.42) C14.2
  Bottom Layer w25: C24.2 v1(4650,3650) C23.2 ; C19.2 v1(4963.58,3200) C18.2 ; C17.2 v1(4963.58,3600) C16.2 ; C2.2 v1(5200,4800) ; R2.2 v1(5300,4800)
  other v2: 3974.8,4000 3974.79,4100 3974.8,4200 3974.8,4300 3974.8,4400
  other v3: 4500,4400
HUB_ARM_N: C18.1 R25.2 U5.15 | length 247.6
  Top Layer w15: R25.2@5044.9,3242.5 5044.9,3235.1 5070,3210 5090,3210 5095,3215 5095,3293.37 5122.89,3321.26 U5.15
  other v1: 5036.42,3250
HUB_ARM_P: C19.1 R26.2 U5.16 | length 239.9
  Top Layer w15: R26.2@5044.9,3157.5 5044.9,3159.9 5070,3185 5100.36,3185 5120,3204.64 5120,3283.01 5126.75,3289.76 U5.16
  other v1: 5037.4,3150
HUB_FTDI_N: C16.1 R23.2 U5.11 | length 294.1
  Top Layer w15: R23.2@5044.9,3642.5 5044.9,3640.1 5070,3615 5095.36,3615 5120,3590.36 5120,3464.04 5136.79,3447.24 U5.11
  other v1: 5037.4,3650
HUB_FTDI_P: C17.1 R24.2 U5.12 | length 312.4
  Top Layer w15: v1(5037.4,3550) 5044.9,3557.5 5044.9,3564.9 5070,3590 5085,3590 5095,3580 5095,3453.68 5132.93,3415.75 U5.12
HUB_N: C15.1 R21.2 U5.2 | length 213
  Top Layer w15: v1(5350,3712.6) 5350,3660 5360,3650 5420,3650 5428.74,3641.26 U5.2
HUB_P: C14.1 R22.2 R31.2 U5.1 | length 249.5
  Top Layer w15: U5.1 5460.24,3702.36 v1(5450,3712.6) R31.2
JTAG_R\E\S\E\T\: J2.15 R3.2 U2.2
JTAG_TCK: J2.9 J2.11 R4.2
JTAG_TDI: J2.5 R6.2
JTAG_TDO: J2.13
JTAG_TMS: J2.7 R5.2
JTAG_TRST: J2.3 R7.2
KEY_0: J3.60
KEY_1: J3.15
KEY_2: J3.3
KEY_3: J3.6
KEY_4: J3.14
KEY_5: J3.22
KEY_6: J3.30
KEY_7: J3.38
KEY_8: J3.46
KEY_9: J3.54
KEY_A: J3.9
KEY_B: J3.26
KEY_BACK: J3.57
KEY_C: J3.10
KEY_D: J3.8
KEY_DOWN: J3.17
KEY_E: J3.4
KEY_F: J3.16
KEY_G: J3.24
KEY_H: J3.32
KEY_I: J3.44
KEY_J: J3.40
KEY_K: J3.48
KEY_L: J3.56
KEY_M: J3.42
KEY_N: J3.34
KEY_O: J3.52
KEY_P: J3.58
KEY_Q: J3.13
KEY_R: J3.12
KEY_S: J3.1
KEY_SELECT: J3.59
KEY_SHIFT: J3.11
KEY_SPACE: J3.50
KEY_T: J3.20
KEY_U: J3.36
KEY_UP: J3.19
KEY_V: J3.18
KEY_W: J3.5
KEY_X: J3.2
KEY_Y: J3.28
KEY_Z: J3.7
MEMORY_CS: U1.1
MEMORY_HOLD: U1.7
MEMORY_MISO: U1.2
MEMORY_MOSI: U1.5
MEMORY_SCK: U1.6
MEMORY_WP: U1.3
NetC2_1: C2.1 J1.MH1 J1.MH2 R2.1 | length 610.2
  Bottom Layer w40: J1.MH2 5200,4595 ; C2.1 5200,4595 ; R2.1 5300,4595 ; J1.MH1 5300,4595 ; 5200,4595 5300,4595
NetC9_2: C9.2 R15.1 | length 118.2
  Top Layer w10: R15.1 4450,3963.58 C9.2
NetC11_2: C11.2 R12.2 | length 118.2
  Top Layer w10: R12.2 4650,3963.58 C11.2
NetC13_1: C13.1 U4.1 | length 475.4
  Top Layer w10: C13.1 4150,4220 4160,4230 4440,4230 4450.79,4240.79 U4.1
NetD1_1: D1.1 R32.1
NetD2_1: D2.1 R33.1
NetF1_1: F1.1 J1.1 | length 323.5
  Top Layer w40: J1.1 5200,4340 5210,4330 5310,4330 5333.66,4306.34 F1.1
NetL1_1: L1.1 U4.22 | length 293.4
  Top Layer w10: L1.1 4335.51,4305.51 4350,4320 4350,4380 4360.16,4390.16 U4.22
NetL2_1: L2.1 U4.11 | length 273.6
  Top Layer w10: U4.11 4649.53,4429.53 4660,4440 4660,4480 4670,4490 4795.51,4490 L2.1
NetL2_2: L2.2 U4.7 | length 260
  Top Layer w10: U4.7 4600,4350.79 4610,4340.79 4610,4310 4614.49,4305.51 L2.2
NetR8_1: R8.1 R9.2 U4.3 | length 218.5
  Top Layer w10: R9.2 R8.1 ; v1(4490,4180) 4490.16,4180.16 U4.3
NetR31_1: R31.1 U5.27 | length 913.5
  Top Layer w10: U5.27 5517.32,3352.5 5612.5,3352.5 5620,3360 5620,3410 5630,3420 5740,3420 5750,3430 5750,3560 5740,3570 5610,3570 5600,3580 5600,3820 5590,3830 5560,3830 5550,3820 R31.1
OLED_BS0_3V3: J3.47
OLED_BS1_3V3: J3.49
OLED_BS2_3V3: J3.51
OLED_CS_3V3: J3.43
OLED_DB0_3V3: J3.27
OLED_DB1_3V3: J3.29
OLED_DB2_3V3: J3.31
OLED_DB3_3V3: J3.33
OLED_DB4_3V3: J3.35
OLED_DB5_3V3: J3.37
OLED_DB6_3V3: J3.39
OLED_DB7_3V3: J3.41
OLED_DC_3V3: J3.21
OLED_E_3V3: J3.25
OLED_RES_3V3: J3.45
OLED_RW_3V3: J3.23
PMIC_C\H\R\G\: U4.16 | length 77.4
  Top Layer w10: v1(4480,4550) 4490.16,4539.84 U4.16
PMIC_C\H\R\G\E\N\: R10.2 U4.23 | length 664.1
  Top Layer w10: R10.2 3899.99,4239.99 3910,4250 4110,4250 4130,4270 4360,4270 4370,4280 4370,4360 4380.47,4370.47 U4.23
PMIC_CLPROG: C12.1 R18.1 U4.2 | length 395.7
  Top Layer w10: R18.1 4250.98,4136.42 C12.1 4350,4200 4360,4210 4460,4210 4470.47,4220.47 U4.2
PMIC_EN1: R17.2 U4.24 | length 732.6
  Top Layer w10: R17.2 3899.99,4139.99 3910,4150 4010,4150 4020,4160 4020,4220 4030,4230 4120,4230 4140,4250 4380,4250 4390,4260 4390,4340 4400.79,4350.79 U4.24
PMIC_FB1: C10.2 C11.1 R13.2 R15.2 R20.1 U4.4 | length 533.8
  Top Layer w10: R15.2 4450.98,4136.42 C10.2 4550,4200 4540,4210 4520,4210 4509.84,4220.16 U4.4 ; C11.1 4750,3963.58 R13.2 R20.1
PMIC_ILIM0: R14.2 U4.13 | length 61.8
  Top Layer w10: U4.13 4549.21,4509.21 v1(4570,4530)
  other v2: 3900,4300
PMIC_ILIM1: R11.2 U4.14 | length 77.6
  Top Layer w10: U4.14 4529.53,4539.53 v1(4540,4550)
  other v2: 3900,4400
PMIC_MODE: R16.2 U4.8 | length 87.6
  Top Layer w10: U4.8 4629.53,4370.47 4640,4360 v1(4640,4340)
  other v2: 3900,4000
PMIC_PROG: R19.1 U4.15 | length 394.6
  Top Layer w10: U4.15 4509.84,4569.84 4520,4580 4782.6,4580 R19.1
PMIC_VC1: C9.1 C10.1 U4.5 | length 477.7
  Top Layer w10: U4.5 4529.53,4240.47 4540,4230 4590,4230 4600,4220 4600,4080 4590,4070 4556.42,4070 C10.1 4550,3963.58 C9.1
R\E\S\E\T\_BUTTON: C1.1 R1.2 SW2.3 SW2.4 U2.1 U5.4 U7.11 | length 1209.5
  Top Layer w10: U7.11 4862.5,3612.5 4870,3620 4870,3790 4880,3800 5270,3800 ; 5270,3990 5270,3800 ; U5.4 5365.75,3621.75 5360,3627.5 5282.5,3627.5 5270,3640 5270,3800
USB_48MHZ: U5.30 Y1.3 | length 204.3
  Top Layer w10: U5.30 5667.24,3447.24 5671.26,3451.26 Y1.3
USB_N: J1.2 R21.1 U6.2 | length 753.6
  Top Layer w15: J1.2 5326.87,4436.44 5371.06,4436.44 5387.5,4420 5387.5,4049.33 5362.6,4024.43 U6.2 5362.6,3892.6 5350,3880 R21.1
USB_P: J1.3 R22.1 U6.1 | length 795
  Top Layer w15: J1.3 5326.87,4461.44 5381.42,4461.44 5412.5,4430.36 5412.5,4049.33 5437.4,4024.43 U6.1 5437.4,3902.6 5450,3890 R22.1
VBAT: P1.1 U4.19
pads on no net: J2.17 J2.19 J3.A1 J3.A2 J3.M1 J3.M2 SW1.3 U3.1 U3.2 U3.3 U3.4 U3.5 U3.6 U3.7 U3.8 U3.9 U3.10 U3.11 U3.12 U3.13 U3.14 U3.15 U3.16 U3.17 U3.18 U3.19 U3.20 U3.21 U3.22 U3.23 U3.24 U3.25 U3.26 U3.27 U3.28 U3.29 U3.30 U3.31 U3.32 U3.33 U3.34 U3.35 U3.36 U3.37 U3.38 U3.39 U3.40 U3.41 U3.42 U3.43 U3.44 U3.45 U3.46 U3.47 U3.48 U3.49 U3.50 U3.51 U3.52 U3.53 U3.54 U3.55 U3.56 U3.57 U3.58 U3.59 U3.60 U3.61 U3.62 U3.63 U3.64 U3.65 U3.66 U3.67 U3.68 U3.69 U3.70 U3.71 U3.72 U3.73 U3.74 U3.75 U3.76 U3.77 U3.78 U3.79 U3.80 U3.81 U3.82 U3.83 U3.84 U3.85 U3.86 U3.87 U3.88 U3.89 U3.90 U3.91 U3.92 U3.93 U3.94 U3.95 U3.96 U3.97 U3.98 U3.99 U3.100 U3.101 U3.102 U3.103 U3.104 U3.105 U3.106 U3.107 U3.108 U3.109 U3.110 U3.111 U3.112 U3.113 U3.114 U3.115 U3.116 U3.117 U3.118 U3.119 U3.120 U3.121 U3.122 U3.123 U3.124 U3.125 U3.126 U3.127 U3.128 U3.129 U3.130 U3.131 U3.132 U3.133 U3.134 U3.135 U3.136 U3.137 U3.138 U3.139 U3.140 U3.141 U3.142 U3.143 U3.144 U4.18 U5.5 U5.6 U5.9 U5.13 U5.17 U5.19 U5.20 U5.29 U7.2 U7.6 U7.7 U7.16 Y1.1

## Polygon pours and split planes (outlines as drawn)
GND on Signal Layer 1 "GND Plane" (solid, remove dead copper, shelved, pour order 2): 1050,4950 5950,4950 5950,1050 1050,1050 1050,4950
+3V3 on Signal Layer 2 "3V3" (solid, remove dead copper, shelved, pour order 0): 1050,4950 5950,4950 5950,1050 1050,1050 1050,4950

## Keep-outs
Keep-Out Layer:
  lines w10: 1050,1100 ccw(c1100,1100) 1100,1050 1250,1050 5750,1050 5900,1050 ccw(c5900,1100) 5950,1100 5950,4350 5950,4900 ccw(c5900,4900) 5900,4950 3000,4950 1100,4950 ccw(c1100,4900) 1050,4900 1050,1300 1050,1100

## Silkscreen, mask and mechanical layers (free items; w line width, h text height)
Mechanical 8:
  lines w10: 1000,1300 ccw(c1050,1300) 1050,1250 5950,1250 ccw(c5950,1300) 6000,1300 6000,4200 ccw(c5950,4200) 5950,4250 5500,4250 1050,4250 ccw(c1050,4200) 1000,4200 1000,3150 1000,1300
Mechanical 11:
  lines w0.01: 1000,1050 ccw(c1050,1050) 1050,1000 1100,1000 5950,1000 ccw(c5950,1050) 6000,1050 6000,4950 ccw(c5950,4950) 5950,5000 1050,5000 ccw(c1050,4950) 1000,4950 1000,1050

## Dimensions
1000,4950 to 6000,4950 on Mechanical 11
1050,5000 to 1100,1000 on Mechanical 11

## Text inside footprints (layer, text, board x,y; h text height)
J1: Mechanical 15 "^ Edge ^" at 5480,4965 h60 r180
P1: Mechanical 15 "^ Edge ^" at 3334.65,4486.22 h60 r270
SW1: Mechanical 15 "^ Edge ^" at 5959.17,4098.62 h60 r90